# Altium PCB Fly_Control_V1.1.PcbDoc
Units mil, origin at the board's own origin, x right, y up, seen from the top; angles counter-clockwise.
Board outline 3346.46 x 3838.58 mil, 2 copper layers (Top Layer, Bottom Layer); 95 components, 81 nets, 352 pads, 224 vias.
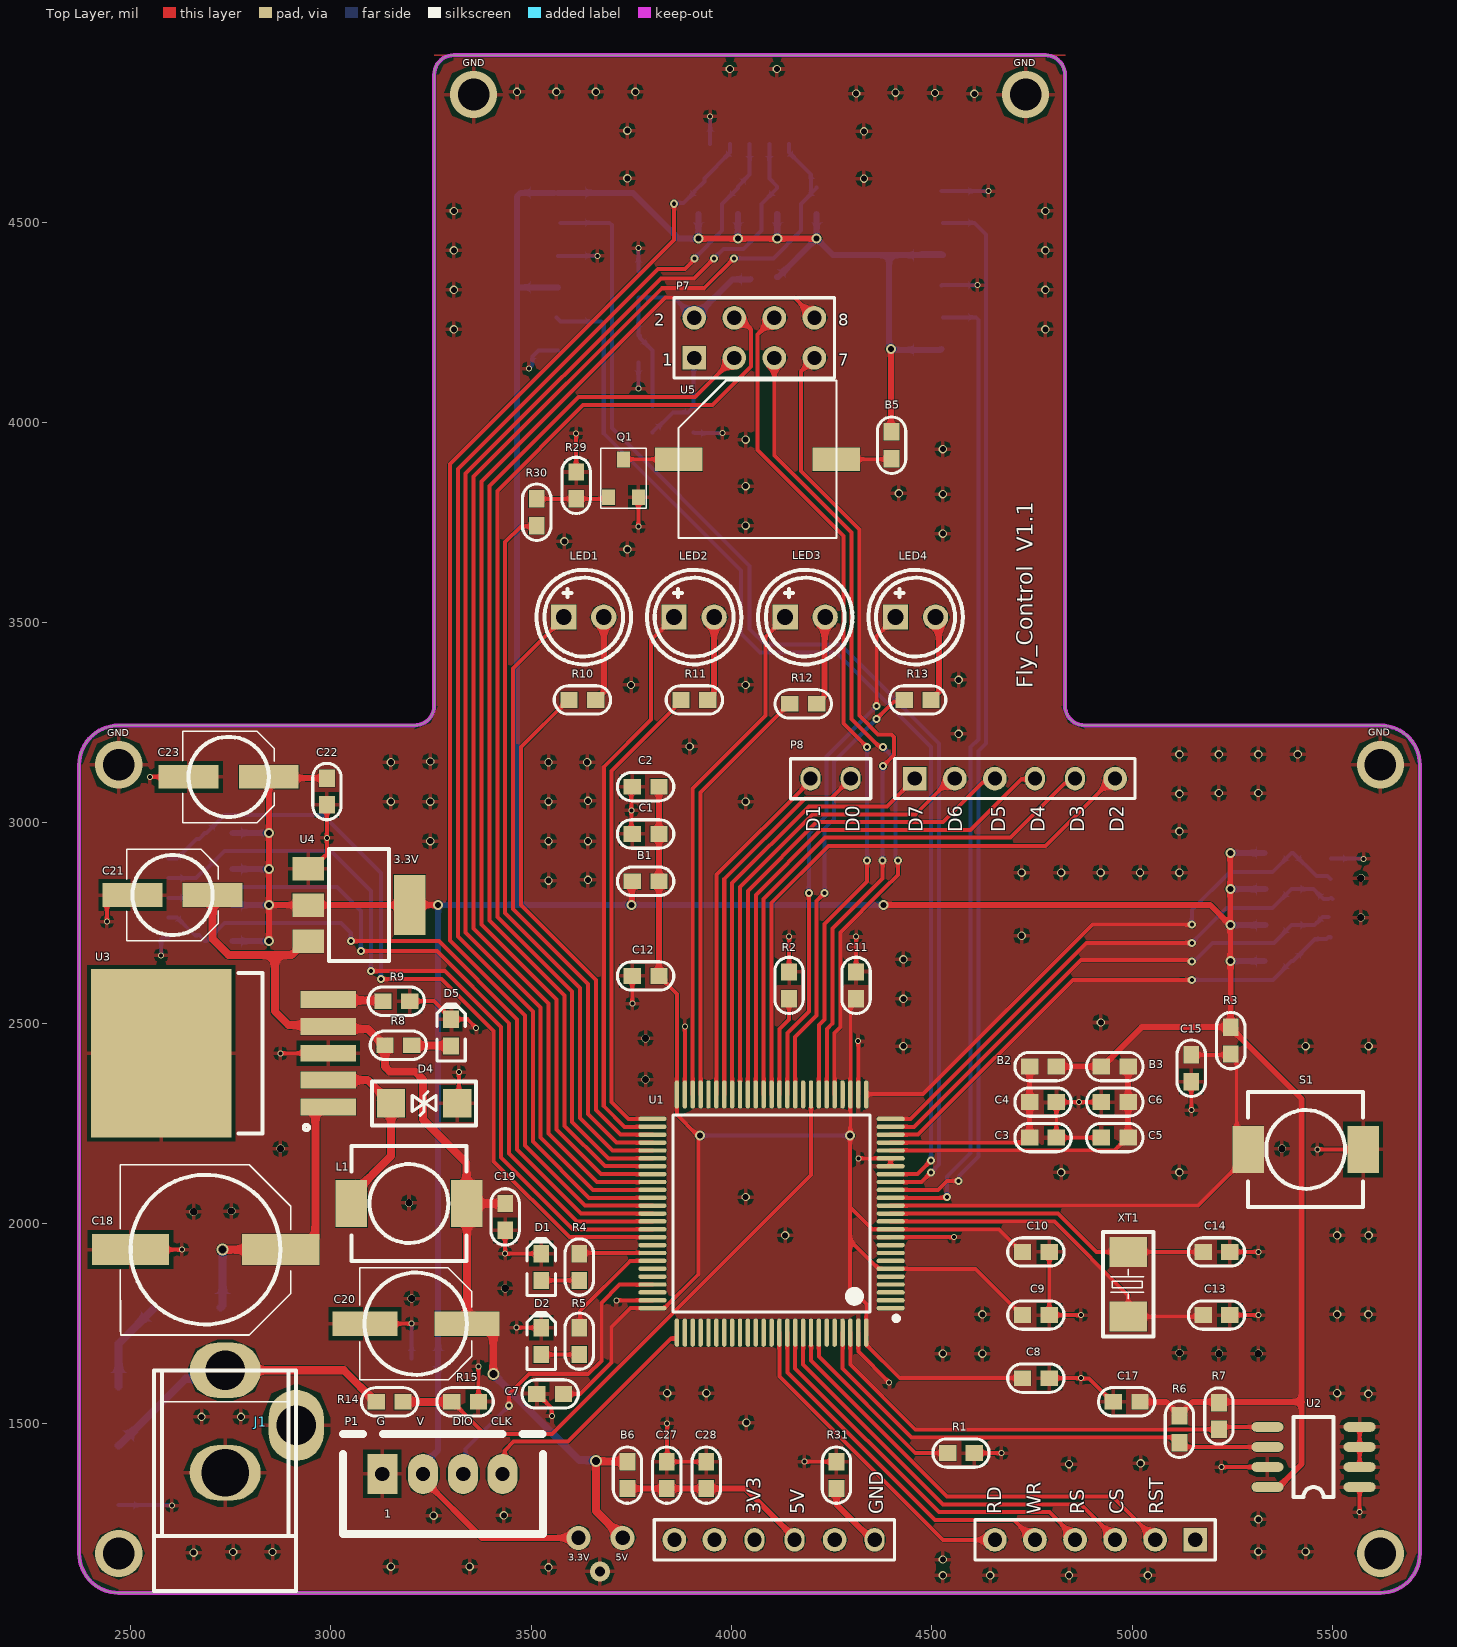
[diagram p0: Top Layer view]
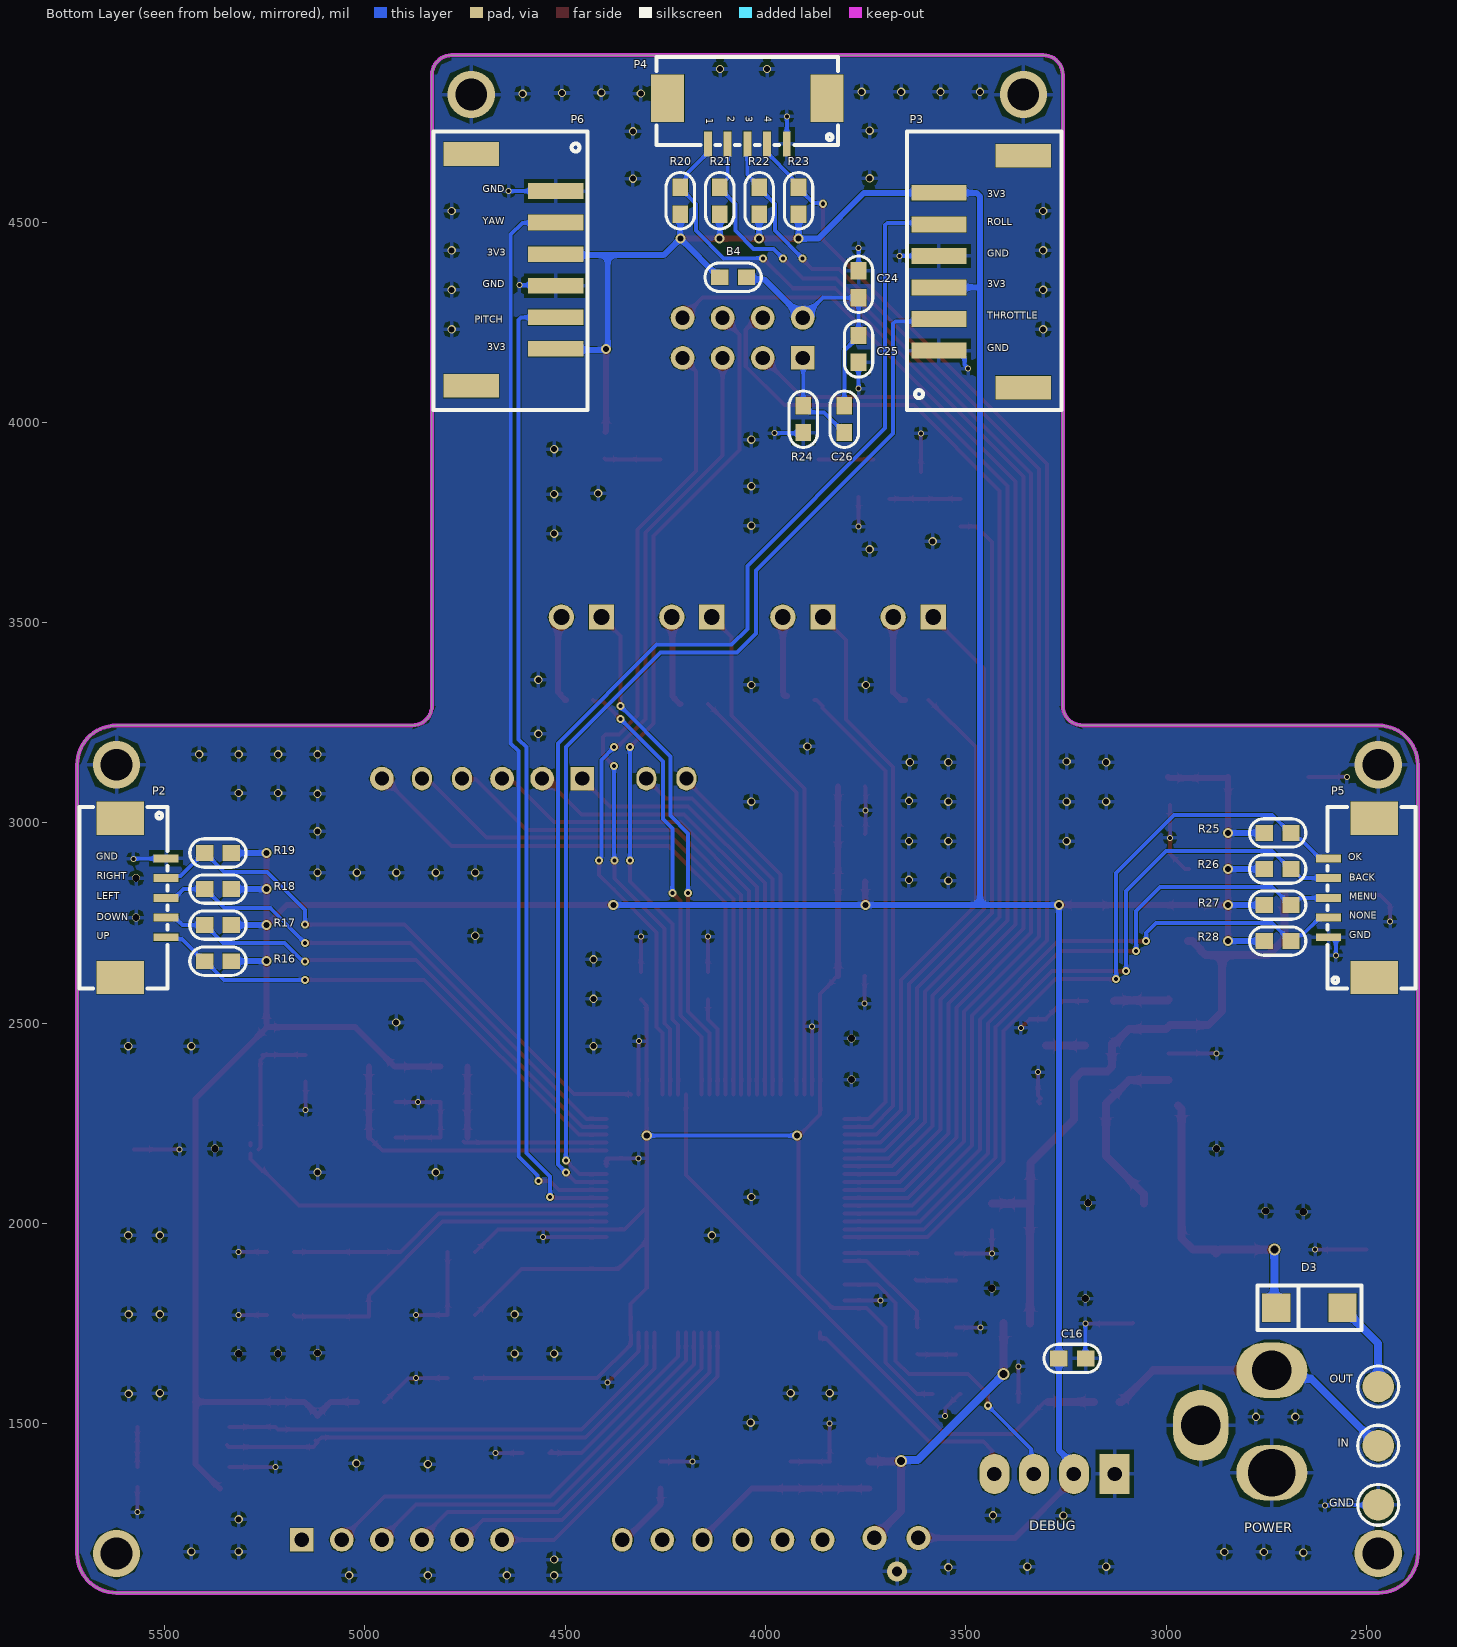
[diagram p1: Bottom Layer view, seen from below]

## Layer stack, top to bottom
Top Solder: solder mask 0.4, Solder Resist, Dk 3.5
Top Layer: signal copper 1.4
Dielectric 1: dielectric 12.6, FR-4, Dk 4.8
Bottom Layer: signal copper 1.4
Bottom Solder: solder mask 0.4, Solder Resist, Dk 3.5

## Board outline
2371.81,1176.36 2371.81,3145 cw(c2470.24,3145) 2470.24,3243.43 3208.43,3243.43 ccw(c3208.43,3292.64) 3257.64,3292.64 3257.64,4867.44 cw(c3306.85,4867.44) 3306.85,4916.65 4783.23,4916.65 cw(c4783.23,4867.44) 4832.44,4867.44 4832.44,3292.64 ccw(c4881.65,3292.64) 4881.65,3243.43 5619.84,3243.43 cw(c5619.84,3145) 5718.27,3145 5718.27,1176.5 cw(c5619.84,1176.5) 5619.84,1078.07 2470.1,1078.07 2470.24,1078.07 cw(c2470.24,1176.5)

## Design rules (kind name [scope] priority, off if disabled: settings)
Clearance [All] p1: gap=1 ignorepadtopadclearanceinfootprint=TRUE
ComponentClearance [All] p1 off: gap=10 collisioncheckmode=3 verticalgap=10 showdistances=FALSE
PolygonConnect [All] p1: connectstyle=Relief reliefconductorwidth=10 reliefentries=4 polygonreliefangle="90 Angle" airgapwidth=10
RoutingVias [All] p1: holewidth=28 width=50 viastyle="Through Hole" minholewidth=5 minwidth=5 maxholewidth=100 maxwidth=150
SilkToSilkClearance [All] p1: silktosilkclearance=1
SolderMaskExpansion [All] p1: expansion=4 istentingtop=FALSE
Width [All] p1: maxlimit=20 minlimit=10 preferedwidth=10
28 further rules are at their usual default settings.

## Classes and differential pairs
component class 基本外设: B4 B5 B6 C18 C19 C20 C21 C22 C23 C24 C25 C26 C27 C28 D3 D4 D5 GND IN J1 L1 LED1 LED2 LED3 LED4 OUT P2 P3 P4 P5 P6 P7 P8 Q1 R8 R9 R10 R11 R12 R13 R14 R15 R16 R17 R18 R19 R20 R21 R22 R23 R24 R25 R26 R27 R28 R29 R30 R31 U3 U4 U5
component class STM32核心系统: B1 B2 B3 C1 C2 C3 C4 C5 C6 C7 C8 C9 C10 C11 C12 C13 C14 C15 C16 C17 D1 D2 P1 R1 R2 R3 R4 R5 R6 R7 S1 U1 U2 XT1

## Components (designator, comment, footprint, x,y, rotation, side; value= is the part's Value field where it differs from the comment)
B1 "MPZ1608S101ATDH5" CC1608-0603 3785.43,2854.33 r0 top value=0R
B2 "MPZ1608S101ATDH5" CC1608-0603 4777.56,2391.73 r180 top value=0R
B3 "MPZ1608S101ATDH5" CC1608-0603 4956.69,2391.73 r0 top value=0R
B4 "MPZ1608S101ATDH5" CC1608-0603 4080.71,4362.2 r180 bottom value=0R
B5 "MPZ1608S101ATDH5" CC1608-0603 4399.61,3942.91 r90 top value=0R
B6 "MPZ1608S101ATDH5" CC1608-0603 3740.16,1372.05 r270 top value=0R
C1 "Cap" CC1608-0603 3785.43,2972.44 r0 top value=106
C2 "Cap" CC1608-0603 3785.43,3090.55 r0 top value=104
C3 "Cap" CC1608-0603 4777.56,2214.57 r180 top value=106
C4 "Cap" CC1608-0603 4777.56,2303.15 r180 top value=104
C5 "Cap" CC1608-0603 4956.69,2214.57 r0 top value=106
C6 "Cap" CC1608-0603 4956.69,2303.15 r0 top value=104
C7 "Cap" CC1608-0603 3547.24,1574.8 r0 top value=104
C8 "Cap" CC1608-0603 4759.84,1614.17 r180 top value=104
C9 "Cap" CC1608-0603 4759.84,1771.65 r180 top value=104
C10 "Cap" CC1608-0603 4759.84,1929.13 r180 top value=104
C11 "Cap" CC1608-0603 4311.02,2594.49 r270 top value=104
C12 "Cap" CC1608-0603 3785.43,2618.11 r0 top value=104
C13 "Cap" CC1608-0603 5210.63,1771.65 r0 top value=220
C14 "Cap" CC1608-0603 5210.63,1929.13 r0 top value=220
C15 "Cap" CC1608-0603 5147.64,2387.8 r90 top value=104
C16 "Cap" CC1608-0603 3234.25,1663.39 r0 bottom value=104
C17 "Cap" CC1608-0603 4986.22,1555.12 r0 top value=104
C18 "Cap Pol2" CDT-10 2875,1935 r0 top value=687
C19 "Cap" CC1608-0603 3435,2016.54 r90 top value=104
C20 "Cap Pol2" CDT-6.3 3339.64,1750 r0 top value=227
C21 "Cap Pol2" CDT-5 2705,2820 r0 top value=226
C22 "Cap" CC1608-0603 2990,3078.46 r90 top value=104
C23 "Cap Pol2" CDT-5 2845,3115 r0 top value=226
C24 "Cap" CC1608-0603 3767.72,4344.49 r270 bottom value=106
C25 "Cap" CC1608-0603 3767.72,4183.07 r90 bottom value=104
C26 "Cap" CC1608-0603 3803.15,4007.87 r270 bottom value=104
C27 "Cap" CC1608-0603 3838.58,1372.05 r270 top value=106
C28 "Cap" CC1608-0603 3937.01,1372.05 r270 top value=104
D1 "LED0" CD1608-0603 3525,1891.54 r90 top
D2 "LED0" CD1608-0603 3525,1706.54 r90 top
D3 "Diode" DO-214AC(SMA)-D 2642.32,1790 r180 bottom
D4 "D Zener" DO-214AC(SMA)-T 3232.68,2300 r180 top
D5 "LED0" CD1608-0603 3300,2476.54 r90 top
GND "PT_TESTPOINT" TP-SMD 2470.47,1297.95 r180 bottom (schematic designator TP3)
IN "PT_TESTPOINT" TP-SMD 2470.47,1445.59 r270 bottom (schematic designator TP2)
J1 "PT_POWERJACK" DC2.2 2736.22,1377.95 r0 top
L1 "Inductor" L7.3X7.3X4.5 3195,2050 r0 top value=33uH
LED1 "DX_LED_无极" LED_无极 3631.1,3513.78 r0 top
LED2 "DX_LED_无极" LED_无极 3906.69,3513.78 r0 top
LED3 "DX_LED_无极" LED_无极 4183.86,3513.78 r0 top
LED4 "DX_LED_无极" LED_无极 4459.45,3513.78 r0 top
OUT "PT_TESTPOINT" TP-SMD 2470.47,1593.23 r270 bottom (schematic designator TP1)
P1 "Header 4" XHT4-2.54 3128.43,1375 r0 top
P2 "Header 5" XHT_1.25_SMD_5p 5553.15,2812.99 r90 bottom
P3 "Header 6" XHT_2.0_SMD_6P 3461.61,4375.98 r90 bottom
P4 "Header 6" XHT_1.25_SMD_5p 4045.28,4751.97 r180 bottom locked
P5 "Header 5" XHT_1.25_SMD_5p 2537.4,2812.99 r270 bottom
P6 "Header 6" XHT_2.0_SMD_6P 4628.94,4380.31 r270 bottom
P7 "nRF24L01" HDR2X4 3906.89,4160.83 r0 top
P8 "Header 10X2A" LCD_2.4_TFT 4467.17,2780.31 r0 top locked
Q1 "TX_NPN" SOT-23-3T 3730.32,3860.24 r90 top
R1 "RX_RES" CC1608-0603 4572.83,1427.17 r0 top value=103
R2 "RX_RES" CC1608-0603 4143.7,2594.49 r90 top value=103
R3 "RX_RES" CC1608-0603 5246.06,2456.69 r270 top value=103
R4 "RX_RES" CC1608-0603 3620,1891.54 r270 top value=102
R5 "RX_RES" CC1608-0603 3620,1706.54 r270 top value=103
R6 "RX_RES" CC1608-0603 5118,1486.54 r90 top value=472
R7 "RX_RES" CC1608-0603 5216.54,1519.68 r90 top value=472
R8 "Res2" CC1608-0603 3168.46,2445 r180 top value=102
R9 "Res2" CC1608-0603 3163.46,2555 r180 top value=473
R10 "RX_RES" CC1608-0603 3627.95,3307.09 r180 top value=471
R11 "RX_RES" CC1608-0603 3907.48,3307.09 r180 top value=471
R12 "RX_RES" CC1608-0603 4179.13,3297.24 r180 top value=471
R13 "RX_RES" CC1608-0603 4464.57,3307.09 r180 top value=471
R14 "Res2" CC1608-0603 3146.54,1555 r180 top value=103
R15 "Res2" CC1608-0603 3335,1555 r0 top value=502
R16 "RX_RES" CC1608-0603 5366.54,2655 r0 bottom value=103
R17 "RX_RES" CC1608-0603 5366.54,2745 r0 bottom value=103
R18 "RX_RES" CC1608-0603 5366.54,2835 r0 bottom value=103
R19 "RX_RES" CC1608-0603 5366.54,2925 r0 bottom value=103
R20 "RX_RES" CC1608-0603 4212.6,4553.15 r90 bottom value=103
R21 "RX_RES" CC1608-0603 4114.17,4553.15 r90 bottom value=103
R22 "RX_RES" CC1608-0603 4015.75,4553.15 r90 bottom value=103
R23 "RX_RES" CC1608-0603 3917.32,4553.15 r90 bottom value=103
R24 "RX_RES" CC1608-0603 3905.51,4007.87 r270 bottom value=0
R25 "RX_RES" CC1608-0603 2721.54,2975 r180 bottom value=103
R26 "RX_RES" CC1608-0603 2721.54,2885 r180 bottom value=103
R27 "RX_RES" CC1608-0603 2721.54,2795 r180 bottom value=103
R28 "RX_RES" CC1608-0603 2721.54,2705 r180 bottom value=103
R29 "RX_RES" CC1608-0603 3612.2,3842.52 r270 top value=103
R30 "RX_RES" CC1608-0603 3513.78,3775.59 r90 top value=102
R31 "RX_RES" CC1608-0603 4261.81,1372.05 r90 top value=0
S1 "KG_SW-PB-2" L7.3X7.3X3.2 5433.07,2185.04 r0 top
U1 "IC_STM32F103VBT6" LQFP-100_L14.0-W14.0-P0.50-LS16.0-BL 4100,2025 r90 top
U2 "AT24CM01" SO8 5452.76,1417.32 r180 top
U3 "IC_LM2596-5.0" TO-263-5 2785,2425 r0 top
U4 "IC_AMS1117-3.3" SOT-223 3070,2795 r0 top
U5 "SC_BEEP" SC_Buzzer -3494.09,3474.41 r0 top locked
XT1 "XT_CRYSTAL2P" OSC2-SMD_L5.0-W3.2 4990.16,1848.42 r270 top value=8MHz

## Footprints (in the part's own frame and the unit in brackets; to place one, negate y for a bottom-side part, rotate by r counter-clockwise, add the part's x,y. Pads: shape width x height; smd on the part's side, far side on the other; paste and mask are expansions set on the pad)
CC1608-0603 [mm]
  rect 1.1x1 smd: 1(-0.85,0) 2(0.85,0)
  silkscreen extent -1.79,-0.9 1.79,0.9
CD1608-0603 [mm]
  rect 1.1x1 smd: 1(-0.85,0) 2(0.85,0)
  silkscreen extent -1.8,-0.9 1.8,0.9
CDT-5 [mm]
  rect 3.8x1.5 smd: 1(0,0) 2(-5.085,0)
  silkscreen extent -5.45,-2.9 0.35,2.9
CDT-6.3 [mil]
  rect 161.42x62 smd: 1(0,0) 2(-254.64,0)
  silkscreen extent -267,-140 12,139
CDT-10 [mm]
  rect 4.9x1.95 smd: 1(0,0) 2(-9.525,0)
  silkscreen extent -10.17,-5.41 0.64,5.39
DC2.2 [mm]
  oval 4.5x3.5 hole 2.5: 1(0,6.5)
  oval 4.5x3.5 hole 3: 2(0,0)
  oval 3.5x4.5 hole 2.5: 2(4.5,3)
  silkscreen extent -4.5,-7.5 4.5,6.5
DO-214AC(SMA)-D [mm]
  rect 1.8x1.8 smd: 1(2.1,0) 2(-2.1,0)
  silkscreen extent -3.3,-1.4 3.3,1.4
DO-214AC(SMA)-T [mm]
  rect 1.8x1.8 smd: 1(-2.1,0) 2(2.1,0)
  silkscreen extent -3.3,-1.4 3.3,1.4
HDR2X4 [mm] "Connector; Header; 4x2 Position"
  rect 1.5x1.5 hole 0.9: 1(0,0)
  round 1.5 hole 0.9: 2(0,2.54) 3(2.54,0) 4(2.54,2.54) 5(5.08,0) 6(5.08,2.54) 7(7.62,0) 8(7.62,2.54)
  silkscreen extent -1.27,-1.27 8.89,3.81
L7.3X7.3X3.2 [mm]
  rect 2x3 smd: 1(-3.65,0) 2(3.65,0)
  silkscreen extent -3.65,-3.65 3.65,3.65
L7.3X7.3X4.5 [mm]
  rect 2x3 smd: 1(-3.65,0) 2(3.65,0)
  silkscreen extent -3.65,-3.65 3.65,3.65
LCD_2.4_TFT [mm]
  round 1.5 hole 0.9: 1(12.454,8.39) 4(4.834,8.39) 5(2.294,8.39) 10(14.994,-39.87) 11(12.454,-39.87) 12(9.914,-39.87) 13(7.374,-39.87) 14(4.834,-39.87) 16(-5.326,-39.87) 19(-12.946,-39.87) 20(-15.486,-39.87)
  oval 1.27x1.5 hole 0.9: 2(9.914,8.39) 3(7.374,8.39) 7(-4.31,8.39) 8(-6.85,8.39) 15(-2.786,-39.87) 17(-7.866,-39.87) 18(-10.406,-39.87)
  rect 1.5x1.5 hole 0.9: 6(-0.246,8.39) 9(17.534,-39.87)
  silkscreen extent -16.76,-41.14 18.8,9.66
LED_无极 [mm]
  rect 1.6x1.6 hole 1: 1(-1.27,0)
  round 1.6 hole 1: 2(1.27,0)
  silkscreen extent -3,-3 3,3
LQFP-100_L14.0-W14.0-P0.50-LS16.0-BL [mm]
  oval 0.28x1.796 smd: 1(-6,-7.55) 2(-5.5,-7.55) 3(-5,-7.55) 4(-4.5,-7.55) 5(-4,-7.55) 6(-3.5,-7.55) 7(-3,-7.55) 8(-2.5,-7.55) 9(-2,-7.55) 10(-1.5,-7.55) 11(-1,-7.55) 12(-0.5,-7.55) 13(0,-7.55) 14(0.5,-7.55) 15(1,-7.55) 16(1.5,-7.55) 17(2,-7.55) 18(2.5,-7.55) 19(3,-7.55) 20(3.5,-7.55) 21(4,-7.55) 22(4.5,-7.55) 23(5,-7.55) 24(5.5,-7.55) 25(6,-7.55) 51(6,7.55) 52(5.5,7.55) 53(5,7.55) 54(4.5,7.55) 55(4,7.55) 56(3.5,7.55) 57(3,7.55) 58(2.5,7.55) 59(2,7.55) 60(1.5,7.55) 61(1,7.55) 62(0.5,7.55) 63(0,7.55) 64(-0.5,7.55) 65(-1,7.55) 66(-1.5,7.55) 67(-2,7.55) 68(-2.5,7.55) 69(-3,7.55) 70(-3.5,7.55) 71(-4,7.55) 72(-4.5,7.55) 73(-5,7.55) 74(-5.5,7.55) 75(-6,7.55)
  oval 1.796x0.28 smd: 26(7.55,-6) 27(7.55,-5.5) 28(7.55,-5) 29(7.55,-4.5) 30(7.55,-4) 31(7.55,-3.5) 32(7.55,-3) 33(7.55,-2.5) 34(7.55,-2) 35(7.55,-1.5) 36(7.55,-1) 37(7.55,-0.5) 38(7.55,0) 39(7.55,0.5) 40(7.55,1) 41(7.55,1.5) 42(7.55,2) 43(7.55,2.5) 44(7.55,3) 45(7.55,3.5) 46(7.55,4) 47(7.55,4.5) 48(7.55,5) 49(7.55,5.5) 50(7.55,6) 76(-7.55,6) 77(-7.55,5.5) 78(-7.55,5) 79(-7.55,4.5) 80(-7.55,4) 81(-7.55,3.5) 82(-7.55,3) 83(-7.55,2.5) 84(-7.55,2) 85(-7.55,1.5) 86(-7.55,1) 87(-7.55,0.5) 88(-7.55,0) 89(-7.55,-0.5) 90(-7.55,-1) 91(-7.55,-1.5) 92(-7.55,-2) 93(-7.55,-2.5) 94(-7.55,-3) 95(-7.55,-3.5) 96(-7.55,-4) 97(-7.55,-4.5) 98(-7.55,-5) 99(-7.55,-5.5) 100(-7.55,-6)
  silkscreen extent -6.8,-8.05 6.25,6.25
OSC2-SMD_L5.0-W3.2 [mm] "无源贴片晶振"
  rect 1.9x2.4 smd: 1(-2.05,0) 2(2.05,0)
  silkscreen extent -3.32,-1.6 3.33,1.6
SC_Buzzer [mm] "蜂鸣器"
  rect 3x1.5 smd: 1(197,11) 2(187,11)
  silkscreen extent 187,6 197,16
SO8 [mil]
  oval 80x24 smd: 1(-115,75) 2(-115,25) 3(-115,-25) 4(-115,-75) 5(115,-75) 6(115,-25) 7(115,25) 8(115,75)
  silkscreen extent -50,-100 50,100
SOT-23-3T [mm]
  rect 1x0.8 smd: B(-1.2,0.95) C(1.2,0) E(-1.2,-0.95)
  silkscreen extent -1.9,-1.45 1.9,1.45
SOT-223 [mil]
  rect 79x59 smd: 1(-126.77,90.55) 2(-126.77,0) 3(-126.77,-90.55)
  rect 79x150 smd: 2(126.77,0.67)
  silkscreen extent -75,-140 75,140
TO-263-5 [mm]
  rect 3.5x1.069 smd: 1(5.3,-3.404) 2(5.3,-1.702) 3(5.3,0) 4(5.3,1.702) 5(5.3,3.404)
  rect 8.89x10.66 smd: 6(-5.3,0)
  silkscreen extent -0.41,-5.08 4.07,5.08
TP-SMD [mm]
  round 2 smd: 1(0,0)
  silkscreen extent -1.3,-1.3 1.3,1.3
XHT4-2.54 [mil]
  rect 75x100 hole 36: 1(0,0)
  oval 75x100 hole 36: 2(101.57,0) 3(201.57,0) 4(300,0)
  silkscreen extent -98,-150 402,100
XHT_1.25_SMD_5p [mm]
  rect 0.5x1.6 smd: 1(2.5,-1.45) 2(1.25,-1.45) 3(0,-1.45) 4(-1.25,-1.45) 5(-2.5,-1.45)
  rect 2.1x3 smd: 6(5.05,1.45) 7(-5.05,1.45)
  silkscreen extent -5.75,-1.52 5.75,4.05
XHT_2.0_SMD_6P [mm]
  rect 1x3.5 smd: 1(-5,2.675) 2(-3,2.675) 3(-1,2.675) 4(1,2.675) 5(3,2.675) 6(5,2.675)
  rect 1.5x3.5 smd: 7(7.35,-2.675) 8(-7.35,-2.675)
  silkscreen extent -8.78,-5.08 8.89,4.7

## Part data
B1 B2 B3 B4 B5 B6: library part FB_BEAD, "磁珠"
C1 C2 C3 C4 C5 C6 C7 C8 C9 C10 C11 C12 C13 C14 C15 C16 C17 C19 C22 C24 C25 C26 C27 C28: "Capacitor", LatestRevisionDate=17-Jul-2002, LatestRevisionNote="Re-released for DXP Platform.", PackageDescription="Radial Cap, Thru-Hole; 2 Leads; 0.3 in Pin Spacing", PackageReference=RAD-0.3, Published=8-Jun-2000, Publisher="Altium Limited"
C18 C20 C21 C23: "Polarized Capacitor (Axial)", LatestRevisionDate=17-Jul-2002, LatestRevisionNote="Re-released for DXP Platform.", PackageDescription="Polarized Capacitor; 2 Leads", PackageReference=POLAR0.8, Published=8-Jun-2000, Publisher="Altium Limited"
D1 D2 D5: "Typical INFRARED GaAs LED", LatestRevisionDate=08-Jul-2005, LatestRevisionNote="Mech Layer 1 removed.", PackageDescription="LED; 2 Leads", PackageReference=LED-0, Published=8-Jun-2000, Publisher="Altium Limited"
D3: "Default Diode", Code_JEDEC=DO-214-AB, LatestRevisionDate=17-Jul-2002, LatestRevisionNote="Re-released for DXP Platform.", PackageDescription="DO-214-AB/SMC; 2 C-Bend Leads; Body 7.9 x 5.9 mm, inc. leads (LxW)", PackageReference=SMC, PackageVersion=Sep-1996, Published=8-Jun-2000, Publisher="Altium Limited"
D4: "Zener Diode", LatestRevisionDate=17-Jul-2002, LatestRevisionNote="Re-released for DXP Platform.", PackageDescription="Diode, Thru-Hole; 2 Leads; 0.7 in Pin Spacing", PackageReference=DIODE-0.7, Published=8-Jun-2000, Publisher="Altium Limited"
GND IN OUT: "测试点"
J1: "DC端子"
LED1 LED2 LED3 LED4: "无极双色发光二极管", BOM_Manufacturer=TOGIALED, BOM_Manufacturer Part=TJ-L5FYTXHMNPLC2R7K-A5, BOM_Supplier=LCSC, BOM_Supplier Part=C440436, Contributor=LCSC, spicePre=L, spiceSymbolName=TJ-L5FYTXHMNPLC2R7K-A5
P1: "Header, 4-Pin", LatestRevisionDate=17-Jul-2002, LatestRevisionNote="Re-released for DXP Platform.", Publisher="Altium Limited"
P2 P5: "Header, 5-Pin", LatestRevisionDate=17-Jul-2002, LatestRevisionNote="Re-released for DXP Platform.", Publisher="Altium Limited"
P3 P6: "Header, 6-Pin", LatestRevisionDate=17-Jul-2002, LatestRevisionNote="Re-released for DXP Platform.", Publisher="Altium Limited"
P4: library part "Header 5", "Header, 5-Pin", LatestRevisionDate=17-Jul-2002, LatestRevisionNote="Re-released for DXP Platform.", Publisher="Altium Limited"
P7: library part "Header 4X2", "Header, 4-Pin, Dual row", LatestRevisionDate=17-Jul-2002, LatestRevisionNote="Re-released for DXP Platform.", Publisher="Altium Limited"
P8: "Header, 10-Pin, Dual row", LatestRevisionDate=17-Jul-2002, LatestRevisionNote="Re-released for DXP Platform.", Publisher="Altium Limited"
Q1: "NPN三极管"
R1 R2 R3 R4 R5 R6 R7 R10 R11 R12 R13 R16 R17 R18 R19 R20 R21 R22 R23 R24 R25 R26 R27 R28 R29 R30 R31: "电阻"
R8 R9 R14 R15: "Resistor", LatestRevisionDate=17-Jul-2002, LatestRevisionNote="Re-released for DXP Platform.", PackageDescription="Axial Device, Thru-Hole; 2 Leads; 0.4 in Pin Spacing", PackageReference=AXIAL-0.4, Published=8-Jun-2000, Publisher="Altium Limited"
S1: "2脚开关"
U1: "STM32单片机", BOM_Manufacturer=ST, BOM_Manufacturer Part=STM32F103VBT6, BOM_Supplier=LCSC, BOM_Supplier Part=C8314, image=http://image.lceda.cn/szlcsc/C8314.jpg, spicePre=U, subpart_no=2, tags=STM32
U2: library part IC_AT24C02, "存储芯片"
U3: library part IC_LM2596, "电源芯片"
U4: library part IC_AMS1117, "电源芯片"
U5: "蜂鸣器"
XT1: "2P晶振"
L1: Code_IEC=1005, Code_JEITA=0402, LatestRevisionDate=29-May-2009, LatestRevisionNote="IPC-7351 Footprint Added.", PackageDescription="Chip Inductor", PackageReference=0402-A, Published=8-Jun-2000, Publisher="Altium Limited"

## Via types
v1: diameter 21, hole 15, Top Layer to Bottom Layer, tented both sides, 106 vias
v2: diameter 15, hole 10, Top Layer to Bottom Layer, tented both sides, 47 vias
v3: diameter 20, hole 10, Top Layer to Bottom Layer, tented both sides, 27 vias
v4: diameter 25, hole 15, Top Layer to Bottom Layer, tented both sides, 18 vias
v5: diameter 20, hole 18, Top Layer to Bottom Layer, tented both sides, 14 vias
v6: diameter 118.11, hole 78.74, Top Layer to Bottom Layer, 6 vias
v7: diameter 30, hole 20, Top Layer to Bottom Layer, tented both sides, 3 vias
v8: diameter 60, hole 36, Top Layer to Bottom Layer, 2 vias
v9: diameter 50, hole 25, Top Layer to Bottom Layer, 1 vias

## Nets (pads, with @x,y where several pads share a name; then routed paths per layer and width w, separated by ;. In a path a pad name is that pad's centre, name@x,y a point inside that pad or via, vN(x,y) a via of type N, cw(c..) or ccw(c..) an arc to the next point about the centre after c; other vN are vias at no path point)
5V: B6.1 C19.2 C20.1 C21.1 L1.2 R8.2 U3.4 U4.3 | length 2515.5
  Top Layer w20: C21.1 2705,2710 2745,2670 2860,2670 ; U4.3@2945,2705 2933.78,2705 2913.73,2684.95 2913.73,2681.72 2902.01,2670 2860,2670 ; R8.2 3135,2391.72 3146.72,2380 3210,2380 3230,2360 3230,2260 3338.7,2151.3 L1.2 ; R8.2@3135,2450 3128.03,2450 3092.56,2485.47 3000.19,2485.47 U3.4 2990.42,2495.24 2894.76,2495.24 2860,2530 2860,2670 ; C20.1 3340,1750.36 3340,2050 C19.2 ; v7(3405.51,1624.02) C20.1@3405.51,1751.97 ; v8(3728.35,1215.55) 3661.42,1282.48 v7(3661.42,1407.48) 3662.4,1406.5 3739.17,1406.5 B6.1@3740.16,1407.48
  Bottom Layer w20: v7(3405.51,1624.02) 3620.13,1409.39 3659.5,1409.39 v7(3661.42,1407.48)
8.4V: IN.1 J1.1 R14.2 | length 756.7
  Top Layer w20: J1.1 3032.24,1633.86 3111.1,1555 R14.2 R14.2@3116.54,1555
  Bottom Layer w20: IN.1 2637.71,1612.83 2715.19,1612.83 J1.1
ADC_Voltage: R14.1 R15.1 U1.33 | length 1511.7
  Top Layer w10: R15.1@3303.39,1555.12 3383.5,1475 3551.77,1475 4198.43,2121.66 U1.33
  Top Layer w20: R14.1 R15.1@3295,1555
BOOT0: R1.1 U1.94 | length 486.8
  Top Layer w10: U1.94 4218.11,1667.72 4458.66,1427.17 R1.1@4537.4,1427.17 ; R1.1@4533.86,1432.68 R1.1
BOOT1: R2.1 U1.37 | length 246.8
  Top Layer w10: U1.37 4119.68,2485.82 4143.7,2509.84 R2.1@4143.7,2559.06
BUZZER: R30.1 U1.55 | length 1823.9
  Top Layer w10: R30.1@3513.78,3740.16 3474.41,3740.16 3435.04,3700.79 3435.04,2775.59 3622.05,2588.58 3622.05,2263.78 3703.35,2182.48 U1.55
GND: C1.1 C2.1 C3.1 C4.1 C5.1 C6.1 C7.1 C8.1 C9.1 C10.1 C11.1 C12.1 C13.2 C14.2 C15.1 C16.1 C17.1 C18.2 C19.1 C20.2 C21.2 C22.1 C23.2 C24.1 C25.1 C27.1 C28.1 D1.2 D2.2 D4.1 D5.2 GND.1 J1.2 P1.1 P2.1 P3.1 P3.4 P4.1 P5.1 P6.1 P6.4 Q1.E R1.2 R2.2 R9.1 R15.2 R24.2 R29.1 R31.2 S1.2 U1.10 U1.19 U1.20 U1.27 U1.49 U1.74 U1.99 U2.1 U2.2 U2.3 U2.4 U2.7 U3.3 U3.6 U4.1 | length 5476.5
  Top Layer w10: v2(2440.94,2753.94) 2440.94,2795.47 2465.47,2820 C21.2 ; C18.2 v2(2627.95,1935) ; v2(2548.47,3115) C23.2 ; v2(2874.02,2425) U3.3 ; U4.1 2953.23,2885.55 2990,2922.32 C22.1 ; C20.2@3083.03,1751.97 C20.2 v2(3201.65,1750) ; R9.1 3256.97,2555 3300,2511.97 D5.2 3340.94,2510 v2(3362.6,2488.35) ; D4.1 3319.69,2304.33 3311.81,2312.21 3319.69,2320.08 v2(3319.69,2377.94) ; R15.2 v2(3368.46,1643.7) ; C19.1 v2(3435,1925) D1.2 ; v2(3463.58,1740) D2.2 ; C7.1 3515.75,1574.8 3550.82,1539.74 3550.82,1520.52 v2(3551.77,1519.57) ; R29.1 v2(3612.2,3972.44) ; v2(3712.6,1808.46) U1.74 ; C12.1 3752.39,2617.69 v2(3752.39,2549.21) ; C1.1 3750,2974.41 3750,3088.58 C2.1 ; v2(3767.72,3739.48) Q1.E ; v2(3839.57,1500.98) 3839.57,1406.5 C27.1 C28.1 ; U1.49 v2(3883.46,2492.13) ; R2.2 v2(4143.7,2716.54) ; v2(4181.73,1405.51) R31.2 ; C11.1 v2(4311.02,2716.54) ; v2(4316.15,2455.14) 4316.54,2454.74 U1.27 ; U1.99 4316.54,1680.51 v2(4393.7,1603.35) ; v2(4316.54,2162.8) U1.20 U1.19 ; U1.10 v2(4555.12,1965.94) ; R1.2 v2(4673.86,1427.17) ; C8.1 v2(4872.05,1614.17) 4873,1613.22 4892.69,1613.22 4950.79,1555.12 C17.1 ; C10.1 C9.1 v2(4872.05,1771.65) ; C5.1 C3.1 C4.1 v2(4867.13,2303.15) C6.1 ; v2(5147.64,2283.46) C15.1 ; v2(5222.64,1392.32) U2.7 ; C13.2 v2(5314.96,1771.65) ; C14.2 v2(5314.96,1929.13) ; v2(5462.6,2185.04) S1.2 ; v2(5567.76,1279.53) U2.1 ; U2.2 U2.3 U2.4
  Bottom Layer w10: GND.1 2471.32,1297.11 2602.5,1297.11 v2(2603.35,1296.26) ; v2(2576.34,2669.57) 2576.34,2709.72 2581.18,2714.57 P5.1 ; C16.1 3201.65,1664.25 v2(3201.65,1750) ; v2(3494.09,4133.86) 3494.09,4135.21 3503.03,4144.15 3503.03,4164.45 3517.72,4179.13 P3.1 ; P3.4 v2(3665.35,4415.35) ; v2(3767.72,4083.97) C25.1 ; C24.1 v2(3767.72,4435.01) ; R24.2 3907.05,3972.87 v2(3977.36,3972.87) ; P4.1 v2(3946.85,4763.78) ; P6.4 4525.21,4342.53 v2(4613.97,4342.53) ; P6.1 v2(4641.24,4577.19) ; P2.1 5496.56,2910.93 5577.26,2910.93 v2(5577.76,2910.43)
  other v1: 4527.56,1122.05 4645.67,1122.05 4842.52,1122.05 5039.37,1122.05 3543.31,1141.73 3149.61,1143.62 3346.46,1143.62 4527.56,1161.42 2657.48,1178.38 2755.91,1180.26 2854.33,1180.26 5314.96,1181.1 5433.07,1181.1 5314.96,1261.73 3256.52,1271.17 3431.96,1271.67 4842.52,1399.52 5021.22,1401.41 4037.04,1502.87 2677.17,1517.63 2775.59,1517.63 5589.43,1574.8 3839.57,1576.69 3937.01,1576.69 5511.81,1576.69 4527.56,1675.11 4625.98,1675.11 4625.98,1773.54 5511.81,1773.54 5589.43,1773.54 4133.86,1970.39 5511.81,1970.39 5590.55,1970.39 4035.43,2066.25 4822.83,2127.87 5118.11,2127.87 4429.13,2442.83 5433.07,2442.83 5590.55,2442.83 4921.69,2501.88 4429.13,2560.94 4429.13,2659.36 4724.41,2718.42 3543.31,2856.22 3641.73,2858.1 4724.41,2875.9 4822.83,2875.9 4921.26,2875.9 5019.69,2875.9 5118.11,2875.9 3248.03,2954.64 3543.31,2954.64 3641.73,2954.64 5118.11,2979.05 3149.61,3053.07 3248.03,3053.07 3543.31,3053.07 4035.43,3053.07 3641.73,3054.95 5118.11,3072.75 5216.54,3074.63 5314.96,3074.63 3149.61,3151.49 3543.31,3151.49 3639.76,3151.49 3248.03,3153.38 5118.11,3171.18 5216.54,3171.18 5314.96,3171.18 5413.39,3171.18 3895.67,3190.86 4566.93,3222.36 3749.21,3344.4 4035.43,3344.4 4566.93,3356.96 3740.16,3682.99 3582.68,3702.67 4527.56,3722.36 4035.43,3742.04 4527.56,3820.78 4417.68,3822.67 4035.43,3840.47 4527.56,3932.99 4035.43,3956.69 3307.09,4232.28 4783.46,4232.28 3307.09,4330.71 4783.46,4330.71 3307.09,4429.13 4783.46,4429.13 3307.09,4527.56 4783.46,4527.56 4330.71,4608.27 3740.16,4609.17 4330.71,4726.29 3740.16,4727.87 4606.3,4820.11 4311.02,4820.65 4507.87,4822 4409.45,4822.83 3464.57,4824.72 3562.99,4824.72 3661.42,4824.72 3759.84,4824.72 3996.06,4881.89 4113.43,4881.89
  other v2: 2990,2962.6 3750,3031.5
  other v5: 5216.54,1675.11 5314.96,1675.11 5118,1677 3201.65,1812.91 3435,1838.3 2657.48,2029.44 2751.34,2031.33 3195,2051.88 2874.02,2186.92 5374.02,2186.92 3785.43,2359.47 3785.43,2462.51 5570.87,2763.78 5570.87,2862.2
  other v6: 2470.24,3145 5619.84,3145 3356.06,4818.23 4734.02,4818.23
  other v9: 3671.26,1131.89
GND_LCD: P8.15 R31.1 | length 165.9
  Top Layer w15: R31.1 4261.81,1299.21 4339.17,1221.85 4341.31,1221.85 4350.39,1212.77 P8.15@4350.39,1210.63
GND_NRF: C26.2 P7.1 R24.1 | length 250.5
  Bottom Layer w10: C26.2 3803.15,3976.38 3817.83,3991.06 3819.8,3991.06 3853.42,4024.68 3890.83,4024.68 3905.51,4039.37 R24.1 P7.1@3905.51,4157.48 ; R24.1@3908.07,4038.78 R24.1@3909.45,4037.4
I2C_SCL: R6.1 U1.97 U2.6 | length 1243.4
  Top Layer w10: U1.97 4277.17,1638.18 4448.82,1466.54 5108.27,1466.54 R6.1@5118.11,1456.69 ; R6.1 5128.75,1442.32 U2.6 5339.96,1442.32 U2.6@5344.49,1446.85 ; R6.1@5119.87,1454.94 R6.1@5123.31,1458.39
I2C_SDA: R7.1 U1.98 U2.5 | length 1190.2
  Top Layer w10: U1.98 4296.85,1648.03 4458.66,1486.22 5167.32,1486.22 R7.1 5222.64,1492.32 U2.5
JTCK/SWCLK: P1.4 U1.76 | length 621.1
  Top Layer w10: P1.4 3434.14,1380.72 3434.14,1434.14 3455.47,1455.47 3591.49,1455.47 3849.13,1713.11 3863.31,1713.11 3863.78,1713.58 U1.76
JTMS/SWDIO: P1.3 U1.72 | length 809.2
  Top Layer w10: P1.3 P1.3@3334.14,1379.14 ; v3(3444.88,1545.28) 3444.88,1574.8 3494.09,1624.02 3641.73,1624.02 3675,1657.28 3675,1802.32 3720.32,1847.63 3802.56,1847.63 U1.72
  Bottom Layer w10: P1.3 3336.61,1381.61 3336.61,1437.01 v3(3444.88,1545.28)
KEY_BACK: P5.4 R26.2 U1.65 | length 1931.4
  Top Layer w10: v3(3100,2630) 3285.35,2630 3425.2,2490.16 3425.2,2165.35 3604.92,1985.63 U1.65
  Bottom Layer w10: P5.4 2663.31,2862.2 R26.2@2685,2883.9 ; R26.2 2690.04,2885 2735.04,2930 3000,2930 3100,2830 v3(3100,2630)
KEY_DOWN: P2.4 R17.2 U1.24 | length 1310.1
  Top Layer w10: U1.24 4456.11,2241.54 4872.05,2657.48 5138.49,2657.48 5139.83,2656.14 5144.2,2656.14 5145.67,2654.67 v3@5145.67,2653.54
  Bottom Layer w10: v3(5148.82,2654.23) 5151.52,2654.23 5156.5,2659.2 5159.2,2659.2 5200.79,2700.79 5353.82,2700.79 5398.03,2745 R17.2 5455.63,2745 5475.63,2765 P2.4@5490,2765
KEY_LEFT: P2.3 R18.2 U1.25 | length 1345.6
  Top Layer w10: U1.25 4446.26,2261.22 4885.83,2700.79 v3@5148.18,2700.79
  Bottom Layer w10: v3(5148.82,2700.14) 5236.08,2787.4 5350.43,2787.4 5398.03,2835 R18.2 5452.4,2835 5477.4,2810 P2.3@5490,2810 ; P2.3 5497.01,2812.99 P2.3@5500,2810
KEY_MENU: P5.3 R27.2 U1.64 | length 1828.9
  Top Layer w10: v3(3075,2680) 3264.88,2680 3444.88,2500 3444.88,2175.2 3614.76,2005.32 U1.64
  Bottom Layer w10: P5.3 2668.11,2812.99 2686.1,2795 R27.2 2690.04,2795 2735.04,2840 3015,2840 3075,2780 v3(3075,2680)
KEY_NONE: P5.2 R28.2 U1.63 | length 1751.1
  Top Layer w10: v3(3050,2705) 3269.41,2705 3464.57,2509.84 3464.57,2185.04 3624.61,2025 U1.63
  Bottom Layer w10: P5.2 2616.14,2763.78 2660.24,2719.69 2671.42,2719.69 2685,2706.1 R28.2@2685,2705 ; R28.2 2690.04,2705 2735.04,2750 3025,2750 3050,2725 v3(3050,2705)
KEY_OK: P5.5 R25.2 U1.66 | length 2032.9
  Top Layer w10: v3(3125,2610) 3275.83,2610 3405.51,2480.32 3405.51,2155.51 3595.08,1965.94 U1.66
  Bottom Layer w10: P5.5 2616.14,2911.42 2665.04,2960.31 2671.42,2960.31 2685,2973.9 R25.2@2685,2975 ; R25.2 2690.04,2975 2735.04,3020 2980,3020 3125,2875 v3(3125,2610)
KEY_RIGHT: P2.2 R19.2 U1.26 | length 1456.9
  Top Layer w10: U1.26 4336.22,2322.36 4336.69,2322.83 4478.35,2322.83 4901.57,2746.06 v3(5148.82,2746.06)
  Bottom Layer w10: v3(5148.82,2746.06) 5148.82,2782.68 5244.09,2877.95 5350.98,2877.95 5398.03,2925 R19.2 5401.97,2925 5459.92,2867.05 5487.95,2867.05 P2.2@5495,2860
KEY_UP: P2.5 R16.2 U1.23 | length 1302.7
  Top Layer w10: U1.23 4465.94,2221.85 4852.36,2608.27 5118.11,2608.27 5118.15,2608.31 5147.6,2608.31 v3@5147.64,2608.27
  Bottom Layer w10: v3@5147.64,2608.27 5351.3,2608.27 5398.03,2655 R16.2 5401.97,2655 5456.69,2709.72 5484.72,2709.72 5490,2715 5495,2715 P2.5@5494.57,2714.57
  other v3: 5148.82,2608.31
LCD_CS: P8.11 U1.92 | length 1042.8
  Top Layer w10: U1.92 4178.74,1648.03 4527.56,1299.21 4872.05,1299.21 P8.11@4960.63,1210.63
LCD_D0: P8.7 U1.44 | length 957.1
  Top Layer w10: U1.44 3981.89,2859.84 4183.07,3061.02 4247.87,3061.02 P8.7
LCD_D1: P8.8 U1.45 | length 883.6
  Top Layer w10: U1.45 3962.2,2870.82 4192.91,3101.54 P8.8@4192.91,3110.24
LCD_D2: P8.1 U1.38 | length 1457.5
  Top Layer w10: U1.38 4100,2800.79 4242.13,2942.91 4783.46,2942.91 P8.1@4950.79,3110.24
LCD_D3: P8.2 U1.39 | length 1384.5
  Top Layer w10: U1.39 4080.31,2810.62 4233.44,2963.76 4696.04,2963.76 4830.73,3098.45 4840.57,3098.45 P8.2@4852.36,3110.24
LCD_D4: P8.3 U1.40 | length 1319.1
  Top Layer w10: U1.40 4060.63,2820.47 4222.44,2982.28 4596.46,2982.28 4723.34,3109.16 P8.3@4761.92,3109.16
LCD_D5: P8.4 U1.41 | length 1240.7
  Top Layer w10: U1.41 4040.94,2830.31 4212.6,3001.97 4527.56,3001.97 4626.83,3101.24 4648.09,3101.24 P8.4
LCD_D6: P8.5 U1.42 | length 1166
  Top Layer w10: U1.42 4021.26,2840.16 4202.76,3021.65 4458.66,3021.65 P8.5@4547.24,3110.24 ; P8.5@4547.24,3110.63 P8.5
LCD_D7: P8.6 U1.43 | length 1091.6
  Top Layer w10: U1.43 4001.57,2850 4192.91,3041.34 4388.19,3041.34 P8.6
LCD_RD: P8.14 U1.89 | length 814
  Top Layer w10: U1.89 4119.68,1618.51 4527.56,1210.63 P8.14@4655.51,1210.63
LCD_RS: P8.12 U1.91 | length 969.8
  Top Layer w10: U1.91 4159.06,1638.18 4517.72,1279.53 4793.31,1279.53 P8.12@4862.2,1210.63
LCD_RST: P8.10 U1.93 | length 1115.8
  Top Layer w10: U1.93 4198.57,1727.62 4198.57,1657.73 4537.4,1318.9 4950.79,1318.9 P8.10@5059.06,1210.63
LCD_WR: P8.13 U1.90 | length 887
  Top Layer w10: U1.90 4139.37,1628.35 4507.87,1259.84 4704.72,1259.84 P8.13@4753.94,1210.63
LED_BLN_G: R10.2 U1.53 | length 1316.9
  Top Layer w10: R10.2@3592.52,3307.09 3474.41,3188.98 3474.41,2795.28 3661.42,2608.27 3661.42,2283.46 3723.03,2221.85 U1.53
LED_BLN_R: LED1.1 U1.54 | length 1562.2
  Top Layer w10: LED1.1@3582.68,3513.78 LED1.1 3554.61,3487.28 3554.61,3485.71 3454.72,3385.83 3454.72,2785.43 3641.73,2598.43 3641.73,2273.62 3713.18,2202.17 U1.54
LED_D1: R4.1 U1.68 | length 183.4
  Top Layer w10: R4.1 3621.57,1926.57 U1.68
LED_D2: R5.1 U1.69 | length 275
  Top Layer w10: R5.1 3622.05,1742.05 3622.05,1781.5 3747.25,1906.69 3802.56,1906.69 U1.69
LED_NONE_G: R13.2 U1.35 | length 1110.2
  Top Layer w10: U1.35 4159.06,2466.15 4212.6,2519.68 4212.6,2805.12 v3(4232.28,2824.8) ; v3(4362.2,3259.84) 4405.51,3303.15 4427.17,3303.15 R13.2
  Bottom Layer w10: v3(4232.28,2824.8) 4232.28,2986.22 4255.91,3009.84 4255.91,3153.54 v3(4362.2,3259.84)
LED_NONE_R: LED4.1 U1.36 | length 1303.4
  Top Layer w10: U1.36 4139.37,2475.98 4192.91,2529.53 v3(4192.91,2824.8) ; v3(4362.2,3291.34) 4362.2,3466.54 LED4.1
  Bottom Layer w10: v3(4192.91,2824.8) 4192.91,2973.79 4237.2,3018.09 4237.2,3166.34 v3(4362.2,3291.34)
LED_SIGNAL_G: R12.2 U1.47 | length 1066.5
  Top Layer w10: U1.47 3922.83,3076.37 R12.2@4143.7,3297.24
LED_SIGNAL_R: LED3.1 U1.48 | length 1287.1
  Top Layer w10: U1.48 3903.15,3086.22 4084.65,3267.72 4084.65,3464.57 LED3.1
LED_STATUS_G: R11.2 U1.51 | length 1200.1
  Top Layer w10: U1.51 3802.61,2261.37 3742.57,2261.37 3700.79,2303.15 3700.79,3129.92 3857.36,3286.5 3857.36,3292.4 3872.05,3307.09 R11.2 R11.2@3877.95,3307.09
LED_STATUS_R: LED2.1 U1.52 | length 1436.3
  Top Layer w10: U1.52 3732.87,2241.54 3681.1,2293.31 3681.1,3139.76 3799.21,3257.87 3799.21,3456.3 LED2.1
NetB5_1: B5.1 U5.1 | length 140.6
  Top Layer w10: U5.1 4399.61,3907.48 B5.1@4401.57,3909.45
NetC18_1: C18.1 D3.2 U3.1 | length 736.7
  Top Layer w20: v7(2730,1935) 2865,1935 2875,1925 C18.1@2880,1930 ; C18.1 2933.07,1935 2961.46,1963.39 2961.46,2286.46 U3.1@2970,2295
  Bottom Layer w20: D3.2 2730,1795 v7(2730,1935)
NetD1_1: D1.1 R4.2 | length 100.8
  Top Layer w10: D1.1 R4.2 3623.07,1858.07 R4.2@3625,1860
NetD2_1: D2.1 R5.2 | length 95.8
  Top Layer w10: D2.1 3618.07,1673.07 R5.2@3620,1675
NetD3_1: D3.1 OUT.1 | length 234.1
  Bottom Layer w20: OUT.1 2470.47,1700.83 D3.1 D3.1@2560,1790
NetD4_2: D4.2 L1.1 U3.2 | length 469.7
  Top Layer w20: U3.2 3092,2358 D4.2 3150,2168.39 3055,2073.39 L1.1@3055,2050
NetD5_1: D5.1 R8.1 | length 98.9
  Top Layer w20: R8.1 3202.89,2444.04 3299.04,2444.04 D5.1@3300,2445
NetLED1_2: LED1.2 R10.1 | length 216.8
  Top Layer w15: R10.1@3651.57,3307.09 R10.1@3657.48,3307.09 ; R10.1 3681.1,3326.77 ; 3681.1,3330.71 LED1.2
NetLED2_2: LED2.2 R11.1 | length 204.4
  Top Layer w15: R11.1@3946.85,3316.93 3952.76,3316.93 3955.1,3319.27 3955.1,3325.18 3956.69,3326.77 LED2.2
NetLED3_2: LED3.2 R12.1 | length 226.5
  Top Layer w15: R12.1 4214.57,3297.24 4226.75,3309.43 4226.75,3311.4 4232.28,3316.93 4232.28,3512.2 LED3.2
NetLED4_2: LED4.2 R13.1 | length 219.4
  Top Layer w15: R13.1 4500,3307.09 4512.19,3319.27 4512.19,3321.24 4517.72,3326.77 4517.72,3505.51 LED4.2
NetQ1_B: Q1.B R29.2 R30.2 | length 177.2
  Top Layer w10: R30.2 R29.2 Q1.B@3690.94,3809.06
NetQ1_C: Q1.C U5.2 | length 137.8
  Top Layer w10: Q1.C U5.2
NetR9_2: R9.2 U3.5 | length 138
  Top Layer w20: U3.5 2995.66,2557 3128,2557 R9.2
nRF_CE: P7.3 U1.57 | length 2679.1
  Top Layer w10: U1.57 3683.66,2143.11 3582.68,2244.09 3582.68,2568.9 3395.67,2755.91 3395.67,3840.55 3618.11,4062.99 3909.06,4062.99 4003.94,4157.87 P7.3@4003.94,4161.42
nRF_CS: P7.4 U1.56 | length 2798.1
  Top Layer w10: U1.56 3693.5,2162.8 3602.36,2253.94 3602.36,2578.74 3415.35,2765.75 3415.35,3828.74 3629.49,4042.87 3952.32,4042.87 4049.21,4139.76 4049.21,4231.78 4021.15,4259.84 P7.4@4007.87,4259.84
nRF_IRQ: P7.8 U1.58 | length 3021.5
  Top Layer w10: U1.58 3673.81,2123.43 3562.99,2234.25 3562.99,2559.06 3375.98,2746.06 3375.98,3852.36 3834.65,4311.02 4156.69,4311.02 P7.8@4205.91,4261.81
NRST: C15.2 R3.2 S1.1 U1.14 | length 1314.8
  Top Layer w10: U1.14 5164.77,2044.69 5251.06,2130.98 5255,2130.98 S1.1@5285.43,2161.42 ; C15.2 R3.2@5248.03,2421.26 ; R3.2 R3.2@5248.03,2421.26 ; R3.2@5255.91,2421.26 R3.2@5248.03,2421.26 ; S1.1@5265.75,2185.04 5260.75,2190.04 5260.75,2408.54 R3.2@5248.03,2421.26 ; S1.1@5285.43,2165.35 S1.1@5285.43,2161.42 ; S1.1@5285.43,2175.2 S1.1@5285.43,2161.42 ; S1.1@5285.43,2194.88 S1.1@5285.43,2200.79
OSC_IN: C13.1 U1.12 XT1.2 | length 907.2
  Top Layer w10: U1.12 4805.7,2005.32 4990.16,1820.87 XT1.2@4990.16,1771.65 ; XT1.2 5173.23,1767.71 C13.1
OSC_OUT: C14.1 U1.13 XT1.1 | length 819.6
  Top Layer w10: U1.13 4815.55,2025 4911.42,1929.13 XT1.1 C14.1
PITCH: P6.5 U1.15 | length 2453.9
  Top Layer w10: U1.15 4532.14,2064.37 4534.7,2066.93 v3(4537.4,2066.93)
  Bottom Layer w10: P6.5@4527.56,4261.81 4610.28,4261.81 4616.14,4255.95 4616.14,3208.66 4596.46,3188.98 4596.46,2176.54 4537.4,2117.48 v3(4537.4,2066.93)
ROLL: P3.5 U1.17 | length 3061.7
  Top Layer w10: U1.17 4474.44,2103.74 4496.69,2125.98 v3@4498.03,2125.98
  Bottom Layer w10: P3.5@3572.83,4498.03 3695.53,4498.03 3701.39,4492.17 3701.39,3985.62 4045.28,3641.73 4045.28,3484.25 4084.65,3444.88 4271.65,3444.88 4517.72,3198.82 4517.72,2147.01 v3(4498.03,2127.33)
SPI1_MISO: P7.7 U1.31 | length 2037.8
  Top Layer w10: P7.7 4173.23,4127.17 4173.23,3877.95 4318.9,3732.28 4318.9,3267.72 4366.14,3220.47 4399.65,3220.47 4405.51,3214.61 4405.51,3169.29 v3(4377.95,3141.73) ; U1.31 4237.8,2485.83 4251.97,2500 4251.97,2736.22 4376.97,2861.22 v3(4376.97,2906.5)
  Bottom Layer w10: v3(4376.97,2906.5) 4377.46,2906.99 4377.46,3141.24 v3(4377.95,3141.73)
SPI1_MOSI: P7.6 U1.32 | length 2118.2
  Top Layer w10: P7.6@4106.3,4259.84 4105.91,4259.84 4064.96,4218.9 4064.96,3931.1 4279.53,3716.54 4279.53,3248.03 v3(4338.58,3188.98) ; U1.32 4218.11,2495.67 4232.28,2509.84 4232.28,2748.03 4334.65,2850.39 4338.58,2854.33 v3(4338.58,2906.5)
  Bottom Layer w10: v3(4338.58,2906.5) v3(4338.58,3188.98)
SPI1_SCK: P7.5 U1.30 | length 2036.4
  Top Layer w10: P7.5 4106.89,3916.73 4299.21,3724.41 4299.21,3259.84 4368.17,3190.89 4376.04,3190.89 v3(4377.95,3188.98) ; U1.30 4257.48,2475.98 4271.65,2490.16 4271.65,2726.38 4379.92,2834.65 4415.35,2870.08 v3(4415.35,2906.5)
  Bottom Layer w10: v3(4377.95,3188.98) 4409.45,3157.48 4409.45,2915.11 4415.35,2909.2 v3(4415.35,2906.5)
SWITCH_1: P4.5 R20.2 U1.59 | length 3365.1
  Top Layer w10: U1.59 3663.98,2103.74 3543.31,2224.41 3543.31,2549.21 3356.3,2736.22 3356.3,3864.17 3826.77,4334.65 3931.1,4334.65 v3(4005.91,4409.45)
  Bottom Layer w10: v3(4005.91,4409.45) 4104.33,4409.45 4173.23,4478.35 4173.23,4545.28 4212.6,4584.65 R20.2 ; P4.5 4143.7,4673.23 4197.91,4619.02 4197.91,4581.61 R20.2@4202.76,4576.77
SWITCH_2: P4.4 R21.2 U1.60 | length 3298.5
  Top Layer w10: U1.60 3654.13,2084.06 3523.62,2214.57 3523.62,2539.37 3336.61,2726.38 3336.61,3872.05 3823.82,4359.25 3906.5,4359.25 v3(3956.69,4409.45)
  Bottom Layer w10: v3(3956.69,4409.45) 3980.32,4433.07 4029.53,4433.07 4074.8,4478.35 4074.8,4545.28 4114.17,4584.65 R21.2 4114.17,4588.58 4094.49,4608.27 P4.4
SWITCH_3: P4.3 R22.2 U1.61 | length 3266.1
  Top Layer w10: U1.61 3644.29,2064.37 3503.94,2204.72 3503.94,2529.53 3316.93,2716.54 3316.93,3883.86 3815.94,4382.87 3883.86,4382.87 3902.48,4401.5 3902.48,4401.74 3907.48,4406.74 v3(3907.48,4409.45)
  Bottom Layer w10: v3(3907.48,4409.45) 3976.38,4478.35 3976.38,4545.28 4015.75,4584.65 R22.2 4015.75,4588.58 4045.28,4618.11 P4.3
SWITCH_4: P4.2 R23.2 U1.62 | length 3260.3
  Top Layer w10: U1.62 3634.44,2044.69 3484.25,2194.88 3484.25,2519.68 3297.24,2706.69 3297.24,3895.67 3856.59,4455.01 v3(3856.59,4545.56)
  Bottom Layer w10: v3(3856.59,4545.56) 3858.5,4547.48 3880.15,4547.48 3907.48,4574.8 3907.48,4576.77 3932.01,4601.3 3932.01,4609.17 3996.06,4673.23 P4.2
THROTTLE: P3.2 U1.18 | length 2777.5
  Top Layer w10: U1.18 4463.93,2123.43 4496.01,2155.51 v3@4498.03,2155.51
  Bottom Layer w10: P3.2@3562.99,4261.81 3572.83,4251.97 3675.24,4251.97 3681.1,4246.11 3681.1,3972.44 4023.62,3629.92 4023.62,3472.44 4070.87,3425.2 4261.81,3425.2 4498.03,3188.98 v3(4498.03,2157.53)
VCC_3V3: B1.1 B2.1 B3.1 B4.1 B5.2 C16.2 C17.2 C22.2 C23.1 P1.2 P3.3 P3.6 P6.3 P6.6 R3.1 R6.2 R7.2 R16.1 R17.1 R18.1 R19.1 R20.1 R21.1 R22.1 R23.1 R25.1 R26.1 R27.1 R28.1 U2.8 U4.2 | length 12267.2
  Top Layer w15: v4(2845,2705) v4(2845,2795) ; U4.2@2940,2795 v4(2845,2795) ; U4.2@2943.23,2795 3196.1,2795 U4.2@3196.77,2795.67 ; C22.2@2995,3115 2991.93,3111.93 C22.2 2848.07,3111.93 C23.1 v4(2845,2975) v4(2845,2885) v4(2845,2795) ; U4.2@3198.82,2795.28 v4(3267.72,2795.28) ; P1.2 3230,1362.5 3376.95,1215.55 v8(3618.11,1215.55) ; v4(3750,2795.28) 3750.98,2796.26 3750.98,2853.35 B1.1@3750,2852.36 ; v4(3917.32,4458.66) v4(4015.75,4458.66) v4(4114.17,4458.66) v4(4212.6,4458.66) ; v4(4379.92,2795.28) 5194.72,2795.28 5243.94,2746.06 v4@5245,2746.06 ; v4@4397.64,4185.04 v4(4397.64,4183.07) 4397.64,3978.35 B5.2 ; B2.1 B3.1 4925.2,2391.73 5023.62,2490.16 R3.1 5246.06,2488.19 5423.23,2311.02 5423.23,1555.12 ; C17.2 5084.85,1555.12 R6.2@5118,1521.97 ; R6.2 R6.2@5118,1521.97 ; R7.2 5218.5,1555.12 5423.23,1555.12 ; R7.2@5216.54,1555.12 5151.15,1555.12 R6.2@5118,1521.97 ; v4(5245,2745) v4(5245,2655) 5245.53,2654.47 R3.1@5245.53,2500.53 ; v4(5245,2835) v4@5245,2746.06 ; v4@5245,2840 v4(5245,2925) ; v4@5246.06,2746.06 v4@5245,2746.06 ; U2.8@5362.02,1338.58 5423.23,1399.8 5423.23,1555.12 ; 5423.62,1555.12 5423.23,1555.12
  Bottom Layer w15: R28.1 v4(2845,2705) ; R27.1 v4(2845,2795) ; R26.1 v4(2845,2885) ; R25.1 v4(2845,2975) ; P1.2@3228.35,1368.11 3228.35,1395.27 3267.72,1434.64 C16.2 v4(3267.72,2795.28) 3464.57,2795.28 ; P3.6@3557.09,4572.83 3473.35,4572.83 3464.57,4564.05 3464.57,4337.06 ; P3.3 3465.02,4336.61 3464.57,4337.06 ; P3.6 3753.94,4572.83 3868.11,4458.66 v4(3917.32,4458.66) R23.1 ; v4(4015.75,4458.66) R22.1 ; B4.1 4116.14,4362.2 4210.63,4456.69 v4@4212.6,4456.69 ; v4(4114.17,4458.66) R21.1 ; R20.1 v4(4212.6,4458.66) 4253.94,4417.32 4393.7,4417.32 ; v4(4379.92,2795.28) v4(3750,2795.28) 3464.57,2795.28 ; P6.3@4517.72,4419.29 4474.8,4419.29 4474.41,4419.68 P6.3 ; P6.6 4521.26,4181.1 4402.49,4181.1 4393.7,4189.89 4393.7,4417.32 ; P6.3@4527.56,4417.32 4393.7,4417.32 ; v4(5245,2655) R16.1@5330,2655 ; v4(5245,2745) R17.1 ; v4(5245,2835) R18.1 ; v4(5245,2925) R19.1@5330,2925 ; 3464.57,2795.28 3464.57,4337.06
VCC_LCD: B6.2 C27.2 C28.2 P8.17 | length 471.3
  Top Layer w15: B6.2 C27.2 C28.2 4034.05,1338.58 4153.54,1219.09 P8.17@4153.54,1210.63
VCC_MCU: B1.2 C1.2 C2.2 C7.2 C8.2 C9.2 C10.2 C11.2 C12.2 U1.6 U1.11 U1.28 U1.50 U1.75 U1.100 | length 4423.2
  Top Layer w10: C7.2@3582.68,1574.8 3622.05,1574.8 3700.79,1653.54 3700.79,1742.13 3747.44,1788.78 U1.75 3803.09,1789.11 3832.93,1789.11 3917.32,1873.51 3917.32,2206.26 3918.23,2207.16 3918.23,2216.75 v4(3921.1,2219.62) ; C12.2 3820.87,2618.11 3835.55,2603.43 3835.55,2601.46 3863.78,2573.23 U1.50 3863.78,2271.89 3913.18,2222.49 3914.17,2222.49 v4@3918.23,2218.43 ; v4@4296.32,2214.57 4296.32,1958.29 ; v4@4296.85,2218.9 U1.28 4296.85,2544.88 C11.2@4311.02,2559.06 ; 4301.18,2036.22 4351.77,1985.63 U1.11 4667.91,1985.63 C10.2@4724.41,1929.13 ; U1.100@4336.22,1721.46 4336.22,1697.92 4419.97,1614.17 C8.2@4724.41,1614.17 ; U1.100@4336.61,1721.46 4336.61,1799.21 4296.32,1839.51 4296.32,1958.29 ; C9.2@4724.41,1771.65 4608.86,1887.2 U1.6 4367.4,1887.2 4296.32,1958.29
  Top Layer w15: C12.2 B1.2 C1.2 C2.2
  Bottom Layer w10: v4(3921.1,2219.62) v4@4296.13,2219.62
  other v4: 4296.32,2219.62
VCC_NRF: B4.2 C24.2 C25.2 C26.1 P7.2 | length 624.7
  Bottom Layer w10: C25.2 C24.2 3856.69,4311.02 3903.94,4263.78 P7.2@3909.45,4263.78 ; C25.2@3771.65,4216.54 3771.65,4210.63 3803.15,4179.13 C26.1
  Bottom Layer w15: P7.2 4003.09,4357.03 4046,4357.03 B4.2@4047.24,4358.27
VCC_VDDA: B2.2 C3.2 C4.2 U1.22 | length 534.9
  Top Layer w10: U1.22 4751.38,2202.17 C3.2@4753.94,2204.72
  Top Layer w15: C3.2 C4.2 B2.2
VCC_VREF+: B3.2 C5.2 C6.2 U1.21 | length 783.4
  Top Layer w10: U1.21 4956.1,2182.48 4988.19,2214.57 C5.2
  Top Layer w15: C5.2 C6.2 B3.2
YAW: P6.2 U1.16 | length 2690.1
  Top Layer w10: U1.16 4515.16,2084.06 4537.4,2106.3 v3(4566.93,2106.3)
  Bottom Layer w10: P6.2@4527.56,4498.03 4606.3,4498.03 4635.83,4468.5 4635.83,3198.82 4616.14,3179.13 4616.14,2167.32 4568.7,2119.88 4568.7,2108.07 v3(4566.93,2106.3)
pads on no net: P2.6 P2.7 P3.7 P3.8 P4.6 P4.7 P5.6 P5.7 P6.7 P6.8 P8.9 P8.16 P8.18 P8.19 P8.20 U1.1 U1.2 U1.3 U1.4 U1.5 U1.7 U1.8 U1.9 U1.29 U1.34 U1.46 U1.67 U1.70 U1.71 U1.73 U1.77 U1.78 U1.79 U1.80 U1.81 U1.82 U1.83 U1.84 U1.85 U1.86 U1.87 U1.88 U1.95 U1.96
copper on no net:
  other v6: 2470.24,1176.5 5619.84,1176.5

## Polygon pours and split planes (outlines as drawn)
GND on Top Layer "GND_L01_P001" (solid, remove dead copper, pour order 1): 3257.64,4916.65 4832.44,4916.65 4832.44,3347.58 4941.84,3238.19 5718.27,3238.19 5718.27,1082.68 2371.81,1082.68 2371.81,3243.19 2372.05,3243.43 3169.21,3243.43 3169.21,3257.99 3257.64,3346.41
no net on Top Layer "NONET_L01_P000" (solid, pour order 0): 3257.64,4916.65 4832.44,4916.65
GND on Bottom Layer "GND_L02_P004" (solid, remove dead copper, pour order 4): 3258.51,4916.19 4833.31,4916.19 4833.31,3347.12 4942.71,3237.73 5719.14,3237.73 5719.14,1082.21 2372.68,1082.21 2372.68,3242.73 2372.92,3242.96 3170.08,3242.96 3170.08,3257.52 3258.51,3345.95

## Keep-outs
Keep-Out Layer:
  lines w10: 2371.81,1176.36 2371.81,3145 cw(c2470.24,3145) 2470.24,3243.43 3208.43,3243.43 ccw(c3208.43,3292.64) 3257.64,3292.64 3257.64,4867.44 cw(c3306.85,4867.44) 3306.85,4916.65 4783.23,4916.65 cw(c4783.23,4867.44) 4832.44,4867.44 4832.44,3292.64 ccw(c4881.65,3292.64) 4881.65,3243.43 5619.84,3243.43 cw(c5619.84,3145) 5718.27,3145 5718.27,1176.5 cw(c5619.84,1176.5) 5619.84,1078.07 2470.1,1078.07 ; 2371.81,1176.5 ccw(c2470.24,1176.5) 2470.24,1078.07

## Silkscreen, mask and mechanical layers (free items; w line width, h text height)
Top Overlay:
  text "GND" at 3329.01,4882.87 h30
  text "GND" at 4704.01,4882.87 h30
  text "Fly_Control  V1.1" at 4751.83,3336.77 h40 r90
  text "GND" at 5589.57,3211.95 h30
  text "GND" at 2441.22,3210.63 h30
  text "3.3V" at 3157.53,2892.48 h35
  text "G" at 3114.62,1488.79 h35
  text "V" at 3214.76,1488.79 h35
  text "DIO" at 3304.06,1488.79 h35
  text "CLK" at 3400.34,1488.79 h35
  text "3.3V" at 3592.52,1152.24 h30
  text "5V" at 3710.63,1151.91 h30
Bottom Overlay:
  text "4" at 4007.52,4763.78 h30 r90
  text "3" at 4055.79,4763.78 h30 r90
  text "2" at 4100.98,4763.81 h30 r90
  text "1" at 4153.54,4758.78 h30 r90
  text "GND" at 4705.72,4568.64 h30
  text "3V3" at 3445.88,4555.52 h30
  text "YAW" at 4705.7,4488.19 h30
  text "ROLL" at 3445.88,4485.57 h30
  text "3V3" at 4694.37,4409.78 h30
  text "GND" at 3445.88,4406.83 h30
  text "3V3" at 3445.88,4331.04 h30
  text "GND" at 4705.72,4331.04 h30
  text "THROTTLE" at 3445.88,4252.3 h30
  text "PITCH" at 4725.17,4242.85 h30
  text "3V3" at 4694.37,4173.56 h30
  text "GND" at 3445.88,4170.61 h30
  text "GND" at 5670.29,2901.91 h30
  text "OK" at 2545.29,2900.91 h30
  text "RIGHT" at 5669.29,2852.69 h30
  text "BACK" at 2543,2849.86 h30
  text "LEFT" at 5669.29,2803.15 h30
  text "MENU" at 2543,2802.48 h30
  text "NONE" at 2543,2754.92 h30
  text "DOWN" at 5669.29,2751.39 h30
  text "GND" at 2543,2706.13 h30
  text "UP" at 5669.29,2703.56 h30
  text "DEBUG" at 3341.46,1225.44 h40
  text "POWER" at 2804.62,1220.92 h40

## Text inside footprints (layer, text, board x,y; h text height)
P1: Top Overlay "1" at 3132.95,1258.03 h35
P7: Top Overlay "8" at 4266.89,4240.83 h30; Top Overlay "7" at 4266.89,4140.83 h30; Top Overlay "1" at 3826.89,4140.83 h30; Top Overlay "2" at 3806.89,4240.83 h30
P8: Top Overlay "RD" at 4673.86,1274.41 h35 r90; Top Overlay "WR" at 4772.28,1274.41 h35 r90; Top Overlay "RS" at 4880.55,1274.41 h35 r90; Top Overlay "CS" at 4978.98,1274.41 h35 r90; Top Overlay "RST" at 5077.4,1274.41 h35 r90; Top Overlay "5V" at 4181.73,1274.41 h35 r90; Top Overlay "GND" at 4378.58,1274.41 h35 r90; Top Overlay "3V3" at 4073.46,1274.41 h35 r90; Top Overlay "D5" at 4683.7,2977.17 h35 r90; Top Overlay "D6" at 4575.43,2977.17 h35 r90; Top Overlay "D7" at 4477.01,2977.17 h35 r90; Top Overlay "D0" at 4319.53,2977.17 h35 r90; Top Overlay "D1" at 4221.1,2977.17 h35 r90; Top Overlay "D2" at 4978.98,2977.17 h35 r90; Top Overlay "D3" at 4880.55,2977.17 h35 r90; Top Overlay "D4" at 4782.13,2977.17 h35 r90